# Altium PCB POE.PcbDoc (part 2 of 2)
Units mm, origin at the board's own origin, x right, y up, seen from the top; angles counter-clockwise.
Board outline 57 x 14 mm, 4 copper layers (Top Layer, Layer 1, Layer 2, Bottom Layer), stack 1.571 mm thick; 65 components, 45 nets, 184 pads, 214 vias.
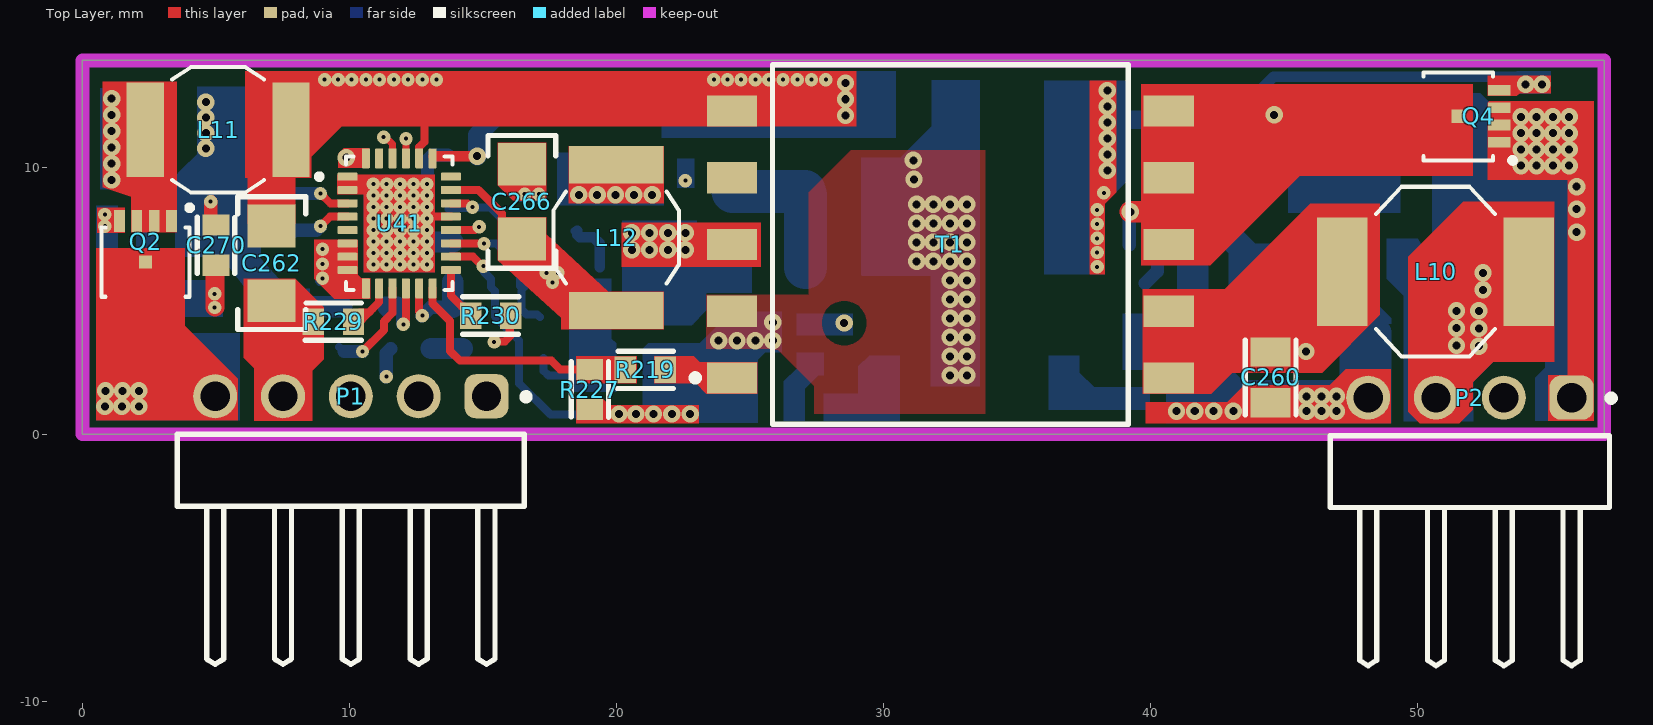
[diagram p0: Top Layer view]

## Other copper (continued)
Bottom Layer: (continued)
  region net VCC_12V: 48.844,7.315 50,7.315 50.477,6.528 53.975,6.528 53.975,2.845 53.95,2.819 52.934,2.819 52.095,1.981 52.095,0.483 49.479,0.483 49.479,5.182 48.844,5.817
  region net NetQ2_4: 0.508,8.56 1.321,8.56 1.321,6.121 0.508,6.121